# Altium PCB Tree.pcbdoc
Units mil, origin at the board's own origin, x right, y up, seen from the top; angles counter-clockwise.
Board outline 645 x 1245 mil, 4 copper layers (Top Layer, Mid-Layer 1, Mid-Layer 2, Bottom Layer); 3 components, 51 nets, 301 pads, 176 vias.
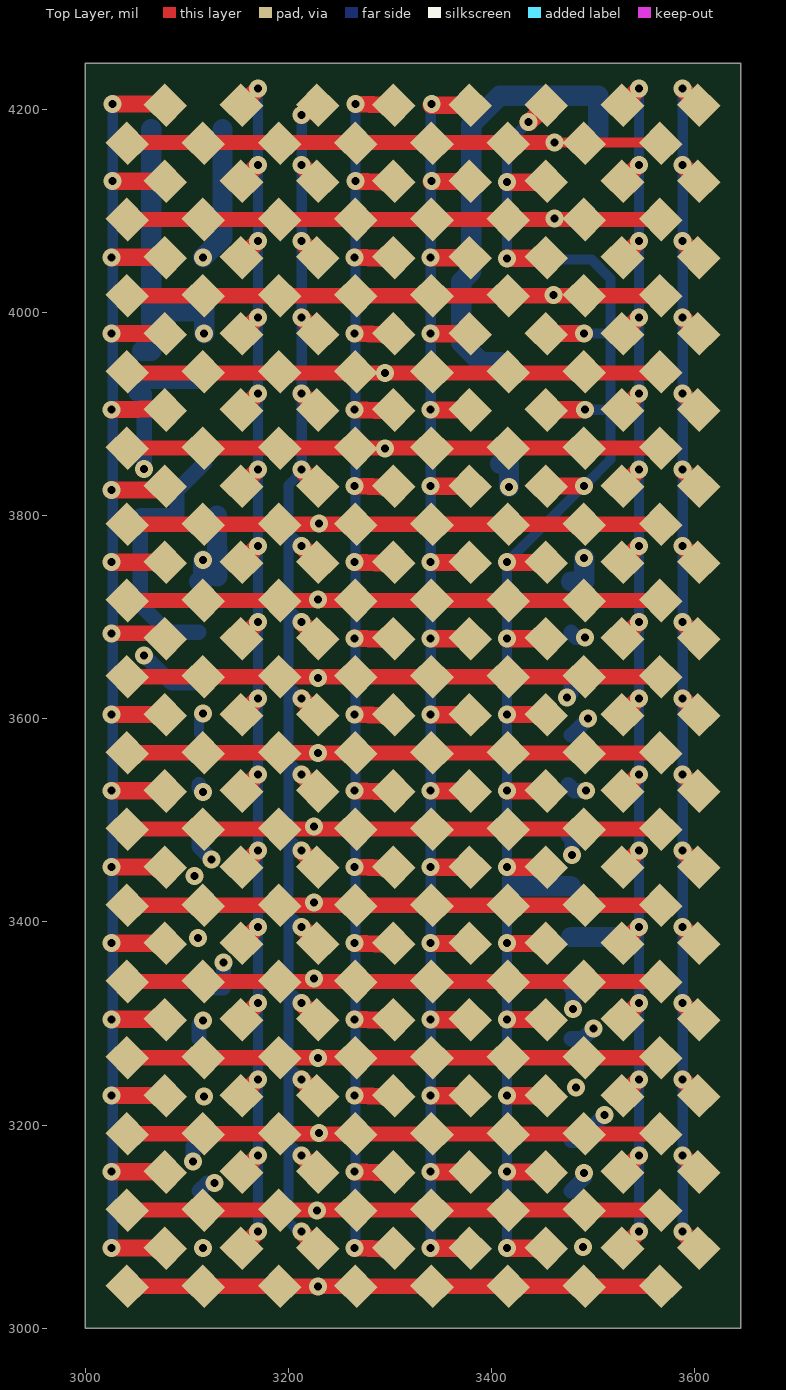
[diagram p0: Top Layer view]
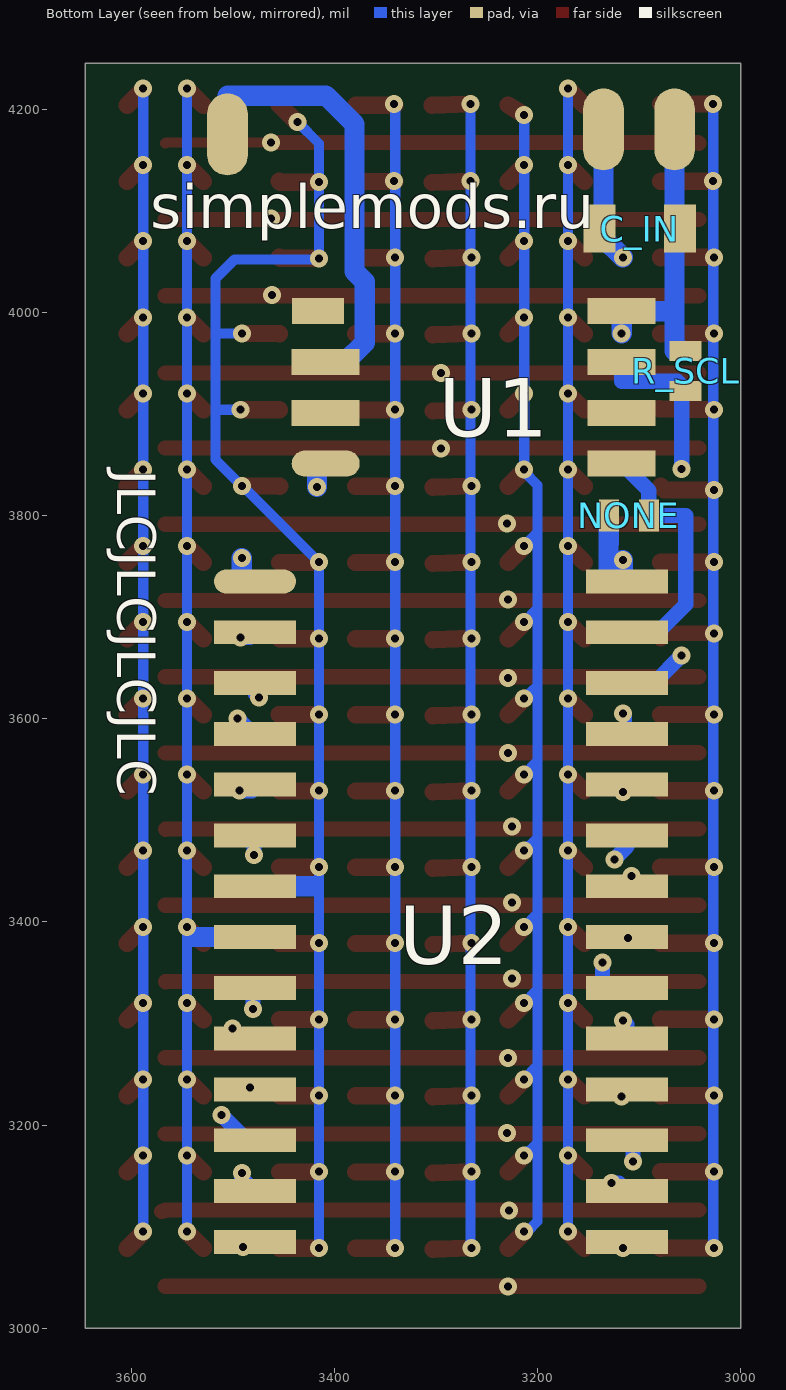
[diagram p1: Bottom Layer view, seen from below]
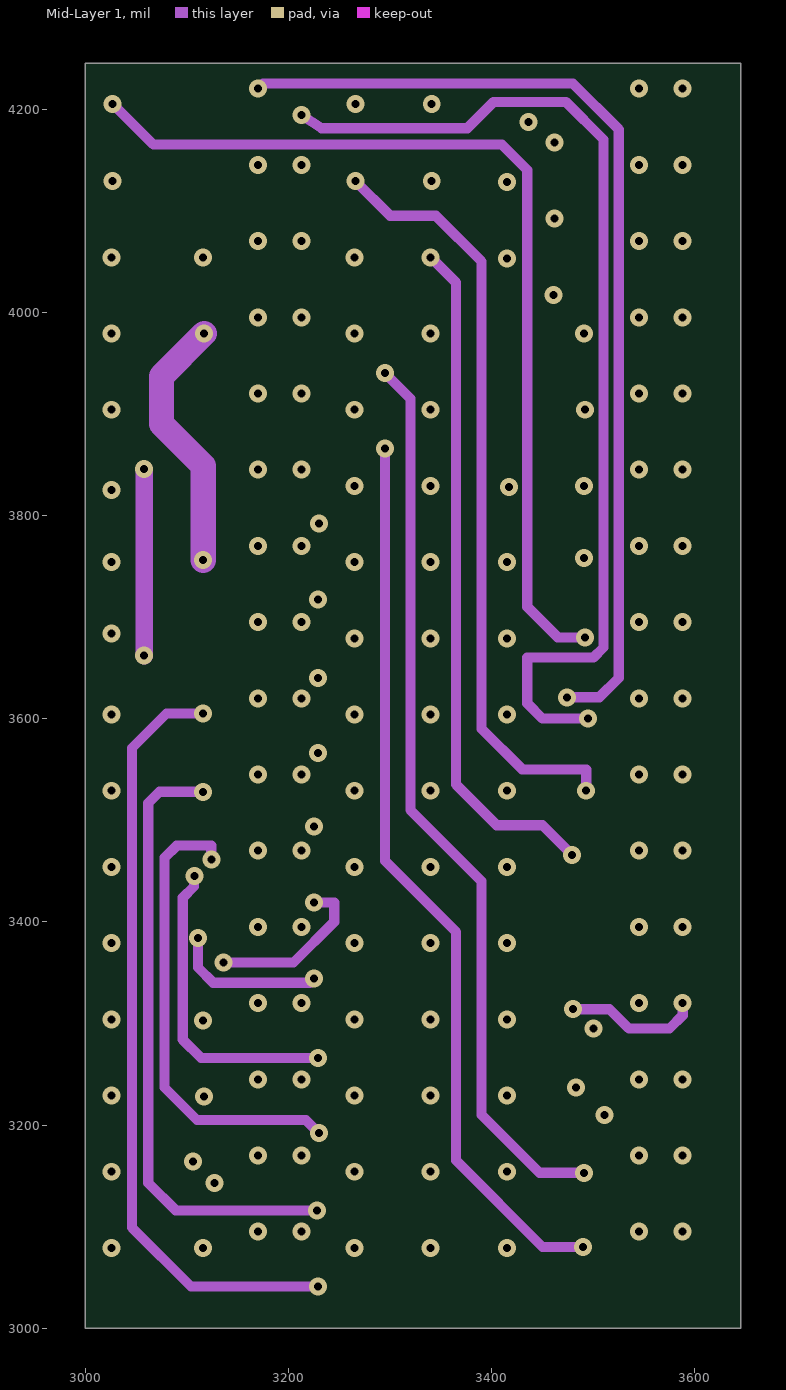
[diagram p2: Mid-Layer 1]
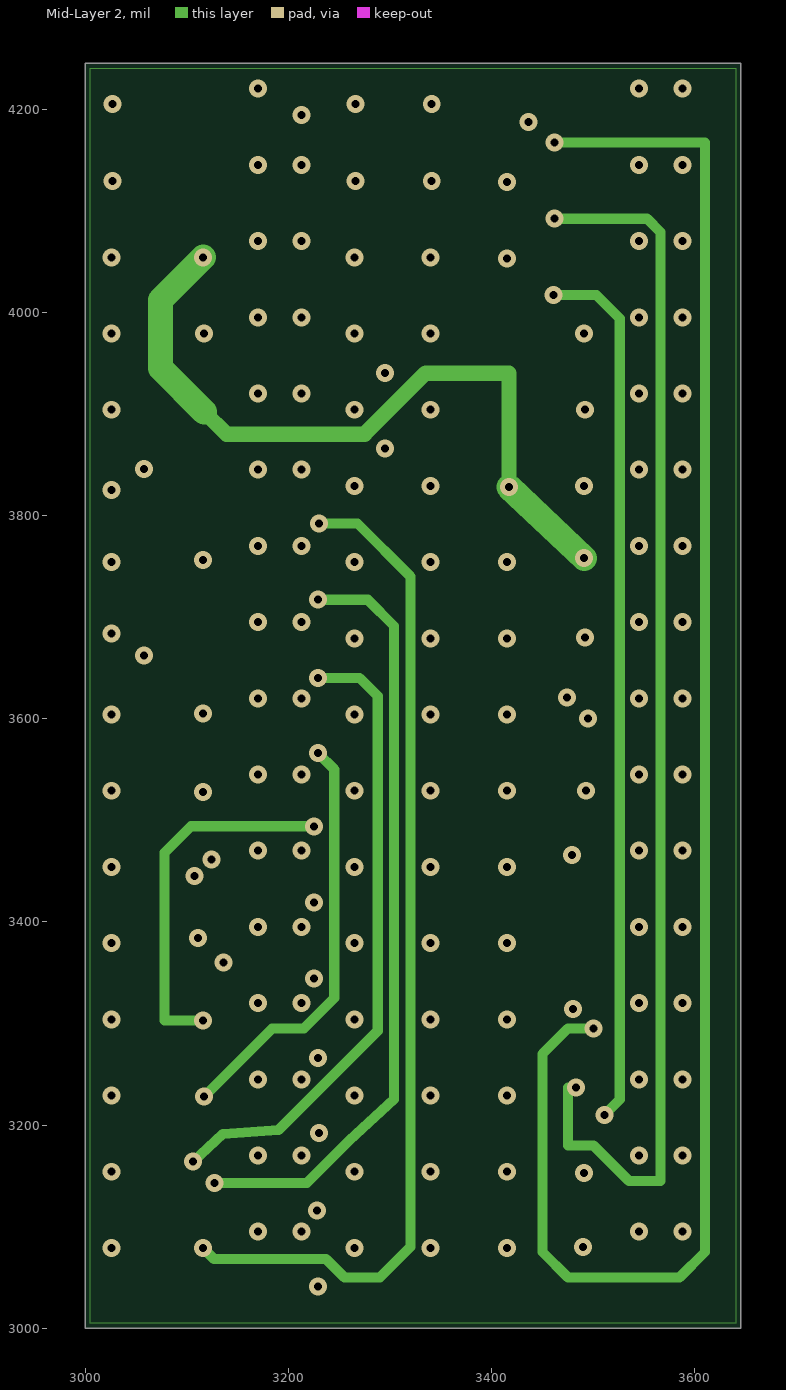
[diagram p3: Mid-Layer 2]

## Layer stack, top to bottom
Top Solder: solder mask 0.4, Solder Resist, Dk 3.5
Top Layer: signal copper 1.4
Dielectric 1: dielectric 12.6, FR-4, Dk 4.8
Mid-Layer 1: signal copper 1.4
Dielectric3: dielectric 12.6, FR-4, Dk 4.8
Mid-Layer 2: signal copper 1.4
Dielectric2: dielectric 12.6, FR-4, Dk 4.8
Bottom Layer: signal copper 1.4
Bottom Solder: solder mask 0.4, Solder Resist, Dk 3.5

## Board outline
3000,4245 3645,4245 3645,3000 3000,3000

## Design rules (kind name [scope] priority, off if disabled: settings)
AssemblyTestPointUsage [All] p0: scope1count=1 scope1_0_kind=Board scope1_0_value=Board scope2count=1 scope2_0_kind=Board scope2_0_value=Board commentlength=0
AssemblyTestpoint [All] p0: scope1count=1 scope1_0_kind=Board scope1_0_value=Board scope2count=1 scope2_0_kind=Board scope2_0_value=Board commentlength=0
Clearance [All] p0: scope1count=1 scope1_0_kind=Board scope1_0_value=Board scope2count=1 scope2_0_kind=Board scope2_0_value=Board commentlength=0 gap=10
Clearance [All] p1: gap=10 ignorepadtopadclearanceinfootprint=FALSE except(0: Arc-Hole Track-Hole SMDPad-Hole THPad-Hole Via-Hole Fill-Hole Poly-Hole Region-Hole Text-Hole)
ComponentClearance [All] p0: scope1count=1 scope1_0_kind=Board scope1_0_value=Board scope2count=1 scope2_0_kind=Board scope2_0_value=Board commentlength=0 gap=10 collisioncheckmode=3
DiffPairsRouting [All] p0: scope1count=1 scope1_0_kind=Board scope1_0_value=Board scope2count=1 scope2_0_kind=Board scope2_0_value=Board commentlength=0
FabricationTestPointUsage [All] p0: scope1count=1 scope1_0_kind=Board scope1_0_value=Board scope2count=1 scope2_0_kind=Board scope2_0_value=Board commentlength=0 valid=0 allowmultiple=FALSE
FabricationTestpoint [All] p0: scope1count=1 scope1_0_kind=Board scope1_0_value=Board scope2count=1 scope2_0_kind=Board scope2_0_value=Board commentlength=0 side=3 testpointundercomponent=TRUE minsize=40 maxsize=100 preferedsize=60 minholesize=0 maxholesize=40 preferedholesize=32 testpointgrid=1
FanoutControl Fanout_BGA [All] p0 off: scope1count=1 scope1_0_kind=Board scope1_0_value=Board scope2count=1 scope2_0_kind=Board scope2_0_value=Board commentlength=69 // Protel DXP Scope 1 Expression Was: IsBGA   Fanout_BGA (Default Rule)
FanoutControl Fanout_LCC [All] p0 off: scope1count=1 scope1_0_kind=Board scope1_0_value=Board scope2count=1 scope2_0_kind=Board scope2_0_value=Board commentlength=69 // Protel DXP Scope 1 Expression Was: IsLCC   Fanout_LCC (Default Rule)
FanoutControl Fanout_SOIC [All] p0 off: scope1count=1 scope1_0_kind=Board scope1_0_value=Board scope2count=1 scope2_0_kind=Board scope2_0_value=Board commentlength=71 // Protel DXP Scope 1 Expression Was: IsSOIC   Fanout_SOIC (Default Rule)
FanoutControl Fanout_Small [All] p0 off: scope1count=1 scope1_0_kind=Board scope1_0_value=Board scope2count=1 scope2_0_kind=Board scope2_0_value=Board commentlength=84 // Protel DXP Scope 1 Expression Was: (CompPinCount < 5)   Fanout_Small (Default Rule)
FanoutControl Fanout_Default [All] p0: scope1count=1 scope1_0_kind=Board scope1_0_value=Board scope2count=1 scope2_0_kind=Board scope2_0_value=Board commentlength=30 // Fanout_Default (Default Rule)
Height [All] p0: scope1count=1 scope1_0_kind=Board scope1_0_value=Board scope2count=1 scope2_0_kind=Board scope2_0_value=Board commentlength=0
HoleSize [All] p0: scope1count=1 scope1_0_kind=Board scope1_0_value=Board scope2count=1 scope2_0_kind=Board scope2_0_value=Board commentlength=0 absolutevalues=TRUE maxlimit=100 minlimit=1 maxpercent=80.000 minpercent=20.000
HoleToHoleClearance [All] p0: scope1count=1 scope1_0_kind=Board scope1_0_value=Board scope2count=1 scope2_0_kind=Board scope2_0_value=Board commentlength=0
LayerPairs [All] p0: scope1count=1 scope1_0_kind=Board scope1_0_value=Board scope2count=1 scope2_0_kind=Board scope2_0_value=Board commentlength=0 enforce=TRUE
MinimumSolderMaskSliver [All] p0: scope1count=1 scope1_0_kind=Board scope1_0_value=Board scope2count=1 scope2_0_kind=Board scope2_0_value=Board commentlength=0
NetAntennae [All] p0: scope1count=1 scope1_0_kind=Board scope1_0_value=Board scope2count=1 scope2_0_kind=Board scope2_0_value=Board commentlength=0
PasteMaskExpansion [All] p0: scope1count=1 scope1_0_kind=Board scope1_0_value=Board scope2count=1 scope2_0_kind=Board scope2_0_value=Board commentlength=0 expansion=0
PlaneClearance [All] p0: scope1count=1 scope1_0_kind=Board scope1_0_value=Board scope2count=1 scope2_0_kind=Board scope2_0_value=Board commentlength=0 clearance=20
PlaneConnect [All] p0: scope1count=1 scope1_0_kind=Board scope1_0_value=Board scope2count=1 scope2_0_kind=Board scope2_0_value=Board commentlength=0 planeconnectstyle=Relief reliefexpansion=20 reliefentries=4 reliefconductorwidth=10 reliefairgap=10
PolygonConnect [All] p0: scope1count=1 scope1_0_kind=Board scope1_0_value=Board scope2count=1 scope2_0_kind=Board scope2_0_value=Board commentlength=0 connectstyle=Relief reliefconductorwidth=10 reliefentries=4 polygonreliefangle="90 Angle"
PolygonConnect [All] p1: connectstyle=Relief reliefconductorwidth=10 reliefentries=4 polygonreliefangle="90 Angle" airgapwidth=10
RoutingCorners [All] p0: scope1count=1 scope1_0_kind=Board scope1_0_value=Board scope2count=1 scope2_0_kind=Board scope2_0_value=Board commentlength=0 cornerstyle=45-Degree minsetback=100 maxsetback=100
RoutingLayers [All] p0: scope1count=1 scope1_0_kind=Board scope1_0_value=Board scope2count=1 scope2_0_kind=Board scope2_0_value=Board commentlength=0 top layer=Automatic mid layer 1=Automatic mid layer 2=Automatic bottom layer=Automatic
RoutingPriority [All] p0: scope1count=1 scope1_0_kind=Board scope1_0_value=Board scope2count=1 scope2_0_kind=Board scope2_0_value=Board commentlength=0
RoutingTopology [All] p0: scope1count=1 scope1_0_kind=Board scope1_0_value=Board scope2count=1 scope2_0_kind=Board scope2_0_value=Board commentlength=0 topology=Shortest
RoutingVias [All] p0: scope1count=1 scope1_0_kind=Board scope1_0_value=Board scope2count=1 scope2_0_kind=Board scope2_0_value=Board commentlength=0 holewidth=28 width=50 viastyle="Through Hole" minholewidth=28 minwidth=50 maxholewidth=28 maxwidth=50
RoutingVias [All] p1: holewidth=28 width=50 viastyle="Through Hole" minholewidth=28 minwidth=50 maxholewidth=28 maxwidth=50
ShortCircuit [All] p0: scope1count=1 scope1_0_kind=Board scope1_0_value=Board scope2count=1 scope2_0_kind=Board scope2_0_value=Board commentlength=0 allowed=FALSE
SilkToBoardRegionClearance [All] p0: scope1count=1 scope1_0_kind=Board scope1_0_value=Board scope2count=1 scope2_0_kind=Board scope2_0_value=Board commentlength=0
SilkToSilkClearance [All] p0: scope1count=1 scope1_0_kind=Board scope1_0_value=Board scope2count=1 scope2_0_kind=Board scope2_0_value=Board commentlength=0
SilkToSolderMaskClearance [All] p0 off: scope1count=1 scope1_0_kind=Board scope1_0_value=Board scope2count=1 scope2_0_kind=Board scope2_0_value=Board commentlength=44 // Protel DXP Scope 1 Expression Was: IsPad
SolderMaskExpansion [All] p0: scope1count=1 scope1_0_kind=Board scope1_0_value=Board scope2count=1 scope2_0_kind=Board scope2_0_value=Board commentlength=0 expansion=4
SolderMaskExpansion [All] p1: expansion=4 istentingtop=FALSE
UnRoutedNet [All] p0: scope1count=1 scope1_0_kind=Board scope1_0_value=Board scope2count=1 scope2_0_kind=Board scope2_0_value=Board commentlength=0
UnpouredPolygon [All] p0: scope1count=1 scope1_0_kind=Board scope1_0_value=Board scope2count=1 scope2_0_kind=Board scope2_0_value=Board commentlength=0
Width [All] p0: scope1count=1 scope1_0_kind=Board scope1_0_value=Board scope2count=1 scope2_0_kind=Board scope2_0_value=Board commentlength=0 maxlimit=10 minlimit=10 preferedwidth=10
Width [All] p1: maxlimit=10 minlimit=10 preferedwidth=10
30 further rules are at their usual default settings.

## Components (designator, comment, footprint, x,y, rotation, side; value= is the part's Value field where it differs from the comment)
C_IN "" --#1 3140,4130 r0 bottom
NONE "R_SDA" --#2 3173.78,3847.73 r0 bottom
R_SCL "R_SCL" --#3 3147.78,3990 r0 bottom

## Footprints (in the part's own frame and the unit in brackets; to place one, negate y for a bottom-side part, rotate by r counter-clockwise, add the part's x,y. Pads: shape width x height; smd on the part's side, far side on the other; paste and mask are expansions set on the pad)
--#1 [mil]
  rect 31.5x47.2 smd mask+0: 1(-80.12,47.7) 2(-1.32,47.7)
--#2 [mil]
  rect 19.68x31.5 smd mask+0: 1(-44.11,47.73) 2(-83.47,47.73)
--#3 [mil]
  rect 31.5x19.68 smd mask+0: 1(-93.78,28) 2(-93.78,67.37)

## Free pads (board coordinates)
  rect 29.53x31.5 smd rot 45 mask+0: 1(3041.26,3041.26) 1(3041.26,3116.26) 1(3041.26,3191.26) 1(3041.26,3266.26) 1(3041.26,3341.26) 1(3041.26,3416.26) 1(3041.26,3491.26) 1(3041.26,3566.26) 1(3041.26,3641.26) 1(3041.26,3716.26) 1(3041.26,3791.26) 1(3041.26,3866.26) 1(3041.26,3941.26) 1(3041.26,4016.26) 1(3041.26,4091.26) 1(3041.26,4166.26) 1(3116.26,3041.26) 1(3116.26,3116.26) 1(3116.26,3191.26) 1(3116.26,3266.26) 1(3116.26,3341.26) 1(3116.26,3416.26) 1(3116.26,3491.26) 1(3116.26,3566.26) 1(3116.26,3641.26) 1(3116.26,3716.26) 1(3116.26,3791.26) 1(3116.26,3866.26) 1(3116.26,3941.26) 1(3116.26,4016.26) 1(3116.26,4091.26) 1(3116.26,4166.26) 1(3191.26,3041.26) 1(3191.26,3116.26) 1(3191.26,3191.26) 1(3191.26,3266.26) 1(3191.26,3341.26) 1(3191.26,3416.26) 1(3191.26,3491.26) 1(3191.26,3566.26) 1(3191.26,3641.26) 1(3191.26,3716.26) 1(3191.26,3791.26) 1(3191.26,3866.26) 1(3191.26,3941.26) 1(3191.26,4016.26) 1(3191.26,4091.26) 1(3191.26,4166.26) 1(3266.26,3041.26) 1(3266.26,3116.26) 1(3266.26,3191.26) 1(3266.26,3266.26) 1(3266.26,3341.26) 1(3266.26,3416.26) 1(3266.26,3491.26) 1(3266.26,3566.26) 1(3266.26,3641.26) 1(3266.26,3716.26) 1(3266.26,3791.26) 1(3266.26,3866.26) 1(3266.26,3941.26) 1(3266.26,4016.26) 1(3266.26,4091.26) 1(3266.26,4166.26) 1(3341.26,3041.26) 1(3341.26,3116.26) 1(3341.26,3191.26) 1(3341.26,3266.26) 1(3341.26,3341.26) 1(3341.26,3416.26) 1(3341.26,3491.26) 1(3341.26,3566.26) 1(3341.26,3641.26) 1(3341.26,3716.26) 1(3341.26,3791.26) 1(3341.26,3866.26) 1(3341.26,3941.26) 1(3341.26,4016.26) 1(3341.26,4091.26) 1(3341.26,4166.26) 1(3416.26,3041.26) 1(3416.26,3116.26) 1(3416.26,3191.26) 1(3416.26,3266.26) 1(3416.26,3341.26) 1(3416.26,3416.26) 1(3416.26,3491.26) 1(3416.26,3566.26) 1(3416.26,3641.26) 1(3416.26,3716.26) 1(3416.26,3791.26) 1(3416.26,3866.26) 1(3416.26,3941.26) 1(3416.26,4016.26) 1(3416.26,4091.26) 1(3416.26,4166.26) 1(3491.26,3041.26) 1(3491.26,3116.26) 1(3491.26,3191.26) 1(3491.26,3266.26) 1(3491.26,3341.26) 1(3491.26,3416.26) 1(3491.26,3491.26) 1(3491.26,3566.26) 1(3491.26,3641.26) 1(3491.26,3716.26) 1(3491.26,3791.26) 1(3491.26,3866.26) 1(3491.26,3941.26) 1(3491.26,4016.26) 1(3491.26,4091.26) 1(3491.26,4166.26) 1(3566.26,3041.26) 1(3566.26,3116.26) 1(3566.26,3191.26) 1(3566.26,3266.26) 1(3566.26,3341.26) 1(3566.26,3416.26) 1(3566.26,3491.26) 1(3566.26,3566.26) 1(3566.26,3641.26) 1(3566.26,3716.26) 1(3566.26,3791.26) 1(3566.26,3866.26) 1(3566.26,3941.26) 1(3566.26,4016.26) 1(3566.26,4091.26) 1(3566.26,4166.26) 2(3078.74,3078.74) 2(3078.74,3153.74) 2(3078.74,3228.74) 2(3078.74,3303.74) 2(3078.74,3378.74) 2(3078.74,3453.74) 2(3078.74,3528.74) 2(3078.74,3603.74) 2(3078.74,3678.74) 2(3078.74,3753.74) 2(3078.74,3828.74) 2(3078.74,3903.74) 2(3078.74,3978.74) 2(3078.74,4053.74) 2(3078.74,4128.74) 2(3078.74,4203.74) 2(3153.74,3078.74) 2(3153.74,3153.74) 2(3153.74,3228.74) 2(3153.74,3303.74) 2(3153.74,3378.74) 2(3153.74,3453.74) 2(3153.74,3528.74) 2(3153.74,3603.74) 2(3153.74,3678.74) 2(3153.74,3753.74) 2(3153.74,3828.74) 2(3153.74,3903.74) 2(3153.74,3978.74) 2(3153.74,4053.74) 2(3153.74,4128.74) 2(3153.74,4203.74) 2(3228.74,3078.74) 2(3228.74,3153.74) 2(3228.74,3228.74) 2(3228.74,3303.74) 2(3228.74,3378.74) 2(3228.74,3453.74) 2(3228.74,3528.74) 2(3228.74,3603.74) 2(3228.74,3678.74) 2(3228.74,3753.74) 2(3228.74,3828.74) 2(3228.74,3903.74) 2(3228.74,3978.74) 2(3228.74,4053.74) 2(3228.74,4128.74) 2(3228.74,4203.74) 2(3303.74,3078.74) 2(3303.74,3153.74) 2(3303.74,3228.74) 2(3303.74,3303.74) 2(3303.74,3378.74) 2(3303.74,3453.74) 2(3303.74,3528.74) 2(3303.74,3603.74) 2(3303.74,3678.74) 2(3303.74,3753.74) 2(3303.74,3828.74) 2(3303.74,3903.74) 2(3303.74,3978.74) 2(3303.74,4053.74) 2(3303.74,4128.74) 2(3303.74,4203.74) 2(3378.74,3078.74) 2(3378.74,3153.74) 2(3378.74,3228.74) 2(3378.74,3303.74) 2(3378.74,3378.74) 2(3378.74,3453.74) 2(3378.74,3528.74) 2(3378.74,3603.74) 2(3378.74,3678.74) 2(3378.74,3753.74) 2(3378.74,3828.74) 2(3378.74,3903.74) 2(3378.74,3978.74) 2(3378.74,4053.74) 2(3378.74,4128.74) 2(3378.74,4203.74) 2(3453.74,3078.74) 2(3453.74,3153.74) 2(3453.74,3228.74) 2(3453.74,3303.74) 2(3453.74,3378.74) 2(3453.74,3453.74) 2(3453.74,3528.74) 2(3453.74,3603.74) 2(3453.74,3678.74) 2(3453.74,3753.74) 2(3453.74,3828.74) 2(3453.74,3903.74) 2(3453.74,3978.74) 2(3453.74,4053.74) 2(3453.74,4128.74) 2(3453.74,4203.74) 2(3528.74,3078.74) 2(3528.74,3153.74) 2(3528.74,3228.74) 2(3528.74,3303.74) 2(3528.74,3378.74) 2(3528.74,3453.74) 2(3528.74,3528.74) 2(3528.74,3603.74) 2(3528.74,3678.74) 2(3528.74,3753.74) 2(3528.74,3828.74) 2(3528.74,3903.74) 2(3528.74,3978.74) 2(3528.74,4053.74) 2(3528.74,4128.74) 2(3528.74,4203.74) 2(3603.74,3078.74) 2(3603.74,3153.74) 2(3603.74,3228.74) 2(3603.74,3303.74) 2(3603.74,3378.74) 2(3603.74,3453.74) 2(3603.74,3528.74) 2(3603.74,3603.74) 2(3603.74,3678.74) 2(3603.74,3753.74) 2(3603.74,3828.74) 2(3603.74,3903.74) 2(3603.74,3978.74) 2(3603.74,4053.74) 2(3603.74,4128.74) 2(3603.74,4203.74)
  oval 40x80.7 smd far side mask+0: 1(3065,4180) 1(3135,4180) 1(3505,4175)
  rect 50.93x25.59 smd far side mask+0: 1(3416,4001)
  oval 80.7x23.6 smd far side mask+0: 1(3478,3735)
  rect 66.93x25.59 smd far side mask+0: 2(3408.34,3951) 3(3408.34,3901) 5(3117,3851) 6(3117,3901) 7(3117,3951) 8(3117,4001)
  rect 80.7x23.6 smd far side mask+0: 2(3478,3685) 3(3478,3635) 4(3478,3585) 5(3478,3535) 6(3478,3485) 7(3478,3435) 8(3478,3385) 9(3478,3335) 10(3478,3285) 11(3478,3235) 12(3478,3185) 13(3478,3135) 14(3478,3085) 15(3112,3085) 16(3112,3135) 17(3112,3185) 18(3112,3235) 19(3112,3285) 20(3112,3335) 21(3112,3385) 22(3112,3435) 23(3112,3485) 24(3112,3535) 25(3112,3585) 26(3112,3635) 27(3112,3685) 28(3112,3735)
  oval 66.93x25.59 smd far side mask+0: 4(3408.34,3851)

## Via types
v1: diameter 17.72, hole 7.87, Top Layer to Bottom Layer, 176 vias

## Nets (pads, with @x,y where several pads share a name; then routed paths per layer and width w, separated by ;. In a path a pad name is that pad's centre, name@x,y a point inside that pad or via, vN(x,y) a via of type N, cw(c..) or ccw(c..) an arc to the next point about the centre after c; other vN are vias at no path point)
COL_1: pad.2@3078.74,3078.74 pad.2@3078.74,3153.74 pad.2@3078.74,3228.74 pad.2@3078.74,3303.74 pad.2@3078.74,3378.74 pad.2@3078.74,3453.74 pad.2@3078.74,3528.74 pad.2@3078.74,3603.74 pad.2@3078.74,3678.74 pad.2@3078.74,3753.74 pad.2@3078.74,3828.74 pad.2@3078.74,3903.74 pad.2@3078.74,3978.74 pad.2@3078.74,4053.74 pad.2@3078.74,4128.74 pad.2@3078.74,4203.74 pad.2@3478,3685 | length 2927.5
  Top Layer w15: v1(3026,3684) 3078.7,3684 pad.2@3078.7,3678.7
  Top Layer w17: v1(3026,3079) 3078.48,3079 pad.2@3078.74,3078.74 ; v1(3026,3154) 3078.48,3154 pad.2@3078.74,3153.74 ; v1(3026,3229) 3078.48,3229 pad.2@3078.74,3228.74 ; v1(3026,3304) 3078.48,3304 pad.2@3078.74,3303.74 ; v1(3026,3379) 3078.48,3379 pad.2@3078.74,3378.74 ; v1(3026,3454) 3078.48,3454 pad.2@3078.74,3453.74 ; v1(3026,3529) 3078.48,3529 pad.2@3078.74,3528.74 ; v1(3026,3604) 3078.48,3604 pad.2@3078.74,3603.74 ; v1(3026,3754) 3078.48,3754 pad.2@3078.74,3753.74 ; v1(3026,3825) 3075,3825 pad.2@3078.7,3828.7 ; v1(3026,3904) pad.2@3080,3905 ; v1(3026,3979) 3078.48,3979 pad.2@3078.74,3978.74 ; v1(3026,4054) 3078.48,4054 pad.2@3078.74,4053.74 ; v1(3027,4129) 3078.48,4129 pad.2@3078.74,4128.74 ; v1(3027,4205) pad.2@3078.7,4205
  Mid-Layer 1 w10: v1(3027,4205) 3067,4165 3410,4165 3435,4140 3435,3710 3465,3680 v1(3492,3680)
  Bottom Layer w10: v1@3027,3081 v1@3027,4207
  Bottom Layer w15: pad.2@3478,3685 3483,3680 v1(3492,3680)
COL_2: pad.2@3153.74,3078.74 pad.2@3153.74,3153.74 pad.2@3153.74,3228.74 pad.2@3153.74,3303.74 pad.2@3153.74,3378.74 pad.2@3153.74,3453.74 pad.2@3153.74,3528.74 pad.2@3153.74,3603.74 pad.2@3153.74,3678.74 pad.2@3153.74,3753.74 pad.2@3153.74,3828.74 pad.2@3153.74,3903.74 pad.2@3153.74,3978.74 pad.2@3153.74,4053.74 pad.2@3153.74,4128.74 pad.2@3153.74,4203.74 pad.3@3478,3635 | length 2483.2
  Top Layer w17: pad.2@3153.74,3078.74 v1(3170,3095) ; pad.2@3153.74,3153.74 v1(3170,3170) ; pad.2@3153.74,3228.74 v1(3170,3245) ; pad.2@3153.74,3303.74 v1(3170,3320) ; pad.2@3153.74,3378.74 v1(3170,3395) ; pad.2@3153.74,3453.74 v1(3170,3470) ; pad.2@3153.74,3528.74 v1(3170,3545) ; pad.2@3153.74,3603.74 v1(3170,3620) ; pad.2@3153.74,3678.74 v1(3170,3695) ; pad.2@3153.74,3753.74 v1(3170,3770) ; pad.2@3153.74,3828.74 v1(3170,3845) ; pad.2@3153.74,3903.74 v1(3170,3920) ; pad.2@3153.74,3978.74 v1(3170,3995) ; pad.2@3153.74,4053.74 v1(3170,4070) ; pad.2@3153.74,4128.74 v1(3170,4145) ; pad.2@3153.74,4203.74 v1(3170,4220)
  Mid-Layer 1 w10: v1(3170,4220) 3175.1,4225 3480,4225 3525,4180 3525,3640 3506,3621 v1(3474,3621)
  Bottom Layer w10: v1(3170,3095) v1(3170,3245) v1(3170,4220)
  Bottom Layer w15: v1(3474,3621) 3478,3625 pad.3@3478,3635
COL_3: pad.2@3228.74,3078.74 pad.2@3228.74,3153.74 pad.2@3228.74,3228.74 pad.2@3228.74,3303.74 pad.2@3228.74,3378.74 pad.2@3228.74,3453.74 pad.2@3228.74,3528.74 pad.2@3228.74,3603.74 pad.2@3228.74,3678.74 pad.2@3228.74,3753.74 pad.2@3228.74,3828.74 pad.2@3228.74,3903.74 pad.2@3228.74,3978.74 pad.2@3228.74,4053.74 pad.2@3228.74,4128.74 pad.2@3228.74,4203.74 pad.4@3478,3585 | length 2678.8
  Top Layer w17: v1(3213,3095) 3213,3094.48 pad.2@3228.74,3078.74 ; v1(3213,3170) 3213,3169.48 pad.2@3228.74,3153.74 ; v1(3213,3245) 3213,3244.48 pad.2@3228.74,3228.74 ; v1(3213,3320) 3213,3319.48 pad.2@3228.74,3303.74 ; v1(3213,3395) 3213,3394.48 pad.2@3228.74,3378.74 ; v1(3213,3470) 3213,3469.48 pad.2@3228.74,3453.74 ; v1(3213,3545) 3213,3544.48 pad.2@3228.74,3528.74 ; v1(3213,3620) 3213,3619.48 pad.2@3228.74,3603.74 ; v1(3213,3695) 3213,3694.48 pad.2@3228.74,3678.74 ; v1(3213,3770) 3213,3769.48 pad.2@3228.74,3753.74 ; v1(3213,3845) 3213,3844.48 pad.2@3228.74,3828.74 ; v1(3213,3920) 3213,3919.48 pad.2@3228.74,3903.74 ; v1(3213,3995) 3213,3994.48 pad.2@3228.74,3978.74 ; v1(3213,4070) 3213,4069.48 pad.2@3228.74,4053.74 ; v1(3213,4145) 3213,4144.48 pad.2@3228.74,4128.74 ; v1(3213,4194) pad.2@3229,4204
  Mid-Layer 1 w10: v1(3213,4194) 3232.7,4181 3376,4181 3402,4207 3473,4207 3510,4170 3510,3670 3500,3660 3435,3660 3435,3615 3450,3600 v1(3495,3600)
  Bottom Layer w10: 3200,3182.8 v1(3213,3170) ; 3200,3258.5 v1(3213,3245) ; 3200,3333.2 v1(3213,3320) ; 3200,3408.3 v1(3213,3395) ; 3200,3482.8 v1(3213,3470) ; 3200,3558.3 v1(3213,3545) ; 3200,3632.4 v1(3213,3620) ; 3200,3708 v1(3213,3695) ; v1(3213,3095) 3210,3095 3200,3105 3200,3783 ; v1(3213,3770) 3200,3783 ; v1(3213,4194) v1(3213,4145) v1(3213,3845) 3213,3843 3200,3830 3200,3783
  Bottom Layer w15: pad.4@3478,3584 3479,3584 v1(3495,3600)
COL_4: pad.2@3303.74,3078.74 pad.2@3303.74,3153.74 pad.2@3303.74,3228.74 pad.2@3303.74,3303.74 pad.2@3303.74,3378.74 pad.2@3303.74,3453.74 pad.2@3303.74,3528.74 pad.2@3303.74,3603.74 pad.2@3303.74,3678.74 pad.2@3303.74,3753.74 pad.2@3303.74,3828.74 pad.2@3303.74,3903.74 pad.2@3303.74,3978.74 pad.2@3303.74,4053.74 pad.2@3303.74,4128.74 pad.2@3303.74,4203.74 pad.5@3478,3535 | length 2508.3
  Top Layer w17: v1(3265,3079) pad.2@3302.74,3077.74 ; v1(3265,3154) pad.2@3302.74,3152.74 ; v1(3265,3229) pad.2@3302.74,3227.74 ; v1(3265,3304) pad.2@3302.74,3302.74 ; v1(3265,3379) pad.2@3302.74,3377.74 ; v1(3265,3454) pad.2@3302.74,3452.74 ; v1(3265,3529) pad.2@3302.74,3527.74 ; v1(3265,3604) pad.2@3302.74,3602.74 ; v1(3265,3679) pad.2@3302.74,3677.74 ; v1(3265,3754) pad.2@3302.74,3752.74 ; v1(3265,3829) pad.2@3302.74,3827.74 ; v1(3265,3904) pad.2@3302.74,3902.74 ; v1(3265,3979) pad.2@3302.74,3977.74 ; v1(3265,4054) pad.2@3302.74,4052.74 ; v1(3266,4129) pad.2@3303.74,4127.74 ; v1(3266,4205) pad.2@3303.74,4203.74
  Mid-Layer 1 w10: v1(3266,4129) 3300,4095 3345,4095 3390,4050 3390,3590 3430,3550 3493,3550 v1(3493,3529)
  Bottom Layer w10: v1(3265,3079) 3266,3080 v1(3266,4205)
  Bottom Layer w15: pad.5@3475,3535 3481,3529 v1(3493,3529)
  other v1: 3265,3079 3265,3154
COL_5: pad.2@3378.74,3078.74 pad.2@3378.74,3153.74 pad.2@3378.74,3228.74 pad.2@3378.74,3303.74 pad.2@3378.74,3378.74 pad.2@3378.74,3453.74 pad.2@3378.74,3528.74 pad.2@3378.74,3603.74 pad.2@3378.74,3678.74 pad.2@3378.74,3753.74 pad.2@3378.74,3828.74 pad.2@3378.74,3903.74 pad.2@3378.74,3978.74 pad.2@3378.74,4053.74 pad.2@3378.74,4128.74 pad.2@3378.74,4203.74 pad.6@3478,3485 | length 2432.1
  Top Layer w17: v1@3340.42,3078.74 pad.2@3378.74,3078.74 ; v1@3340.42,3153.74 pad.2@3378.74,3153.74 ; v1@3340.42,3228.74 pad.2@3378.74,3228.74 ; v1@3340.42,3303.74 pad.2@3378.74,3303.74 ; v1@3340.42,3378.74 pad.2@3378.74,3378.74 ; v1@3340.42,3453.74 pad.2@3378.74,3453.74 ; v1@3340.42,3528.74 pad.2@3378.74,3528.74 ; v1@3340.42,3603.74 pad.2@3378.74,3603.74 ; v1@3340.42,3678.74 pad.2@3378.74,3678.74 ; v1@3340.42,3753.74 pad.2@3378.74,3753.74 ; v1@3340.42,3828.74 pad.2@3378.74,3828.74 ; v1@3340.42,3903.74 pad.2@3378.74,3903.74 ; v1@3340.42,3978.74 pad.2@3378.74,3978.74 ; v1@3340.42,4053.74 pad.2@3378.74,4053.74 ; v1@3340.42,4128.74 pad.2@3378.74,4128.74 ; v1@3340.42,4203.74 pad.2@3378.74,4203.74
  Mid-Layer 1 w10: v1(3340,4054) 3365,4029 3365,3535 3405,3495 3450,3495 v1(3479,3466)
  Bottom Layer w10: v1(3340,3079) 3340,4204 v1(3341,4205)
  Bottom Layer w15: pad.6@3475,3485 3479,3481 v1(3479,3466)
  other v1: 3340,3154 3340,3229 3340,3304 3340,3379 3340,3454 3340,3529 3340,3604 3340,3679 3340,3754 3340,3829 3340,3904 3340,3979 3341,4129 3341,4205
COL_6: pad.2@3453.74,3078.74 pad.2@3453.74,3153.74 pad.2@3453.74,3228.74 pad.2@3453.74,3303.74 pad.2@3453.74,3378.74 pad.2@3453.74,3453.74 pad.2@3453.74,3528.74 pad.2@3453.74,3603.74 pad.2@3453.74,3678.74 pad.2@3453.74,3753.74 pad.2@3453.74,3828.74 pad.2@3453.74,3903.74 pad.2@3453.74,3978.74 pad.2@3453.74,4053.74 pad.2@3453.74,4128.74 pad.2@3453.74,4203.74 pad.7@3478,3435 | length 1960.5
  Top Layer w17: v1(3415,3154) pad.2@3453.7,3153.7 ; v1(3415,3304) pad.2@3453.74,3303.74 ; v1(3415,3604) 3453.74,3603.74 pad.2@3454,3604 ; v1(3415,4053) 3453,4053 pad.2@3454,4054 ; v1(3415,4128) 3453,4128 pad.2@3454,4129 ; v1@3415.42,3078.74 pad.2@3453.74,3078.74 ; v1@3415.42,3228.74 pad.2@3453.74,3228.74 ; v1@3415.42,3378.74 pad.2@3453.74,3378.74 ; v1@3415.42,3453.74 pad.2@3453.74,3453.74 ; v1@3415.42,3528.74 pad.2@3453.74,3528.74 ; v1@3415.42,3678.74 pad.2@3453.74,3678.74 ; v1@3415.42,3753.74 pad.2@3453.74,3753.74 ; v1(3436,4187) 3437,4187 pad.2@3454,4204 ; pad.2@3453.7,3828.7 v1(3491,3829) ; pad.2@3453.74,3903.74 3454,3904 v1(3492,3904) ; pad.2@3453.74,3978.74 3454,3979 v1(3491,3979)
  Bottom Layer w10: v1(3415,3079) v1(3415,3754) 3490,3829 v1(3491,3829) 3517,3855 3517,4033 3498,4052 3416,4052 v1(3415,4053) v1(3415,4128) 3415,4166 v1(3436,4187) ; v1(3491,3979) 3517,3979 ; v1(3492,3904) 3517,3904
  Bottom Layer w20: 3420,3435 pad.7@3478,3435
  other v1: 3415,3229 3415,3379 3415,3454 3415,3529 3415,3679
COL_7: pad.2@3528.74,3078.74 pad.2@3528.74,3153.74 pad.2@3528.74,3228.74 pad.2@3528.74,3303.74 pad.2@3528.74,3378.74 pad.2@3528.74,3453.74 pad.2@3528.74,3528.74 pad.2@3528.74,3603.74 pad.2@3528.74,3678.74 pad.2@3528.74,3753.74 pad.2@3528.74,3828.74 pad.2@3528.74,3903.74 pad.2@3528.74,3978.74 pad.2@3528.74,4053.74 pad.2@3528.74,4128.74 pad.2@3528.74,4203.74 pad.8@3478,3385 | length 1555
  Top Layer w17: pad.2@3528.74,3078.74 v1(3545,3095) ; pad.2@3528.74,3153.74 v1(3545,3170) ; pad.2@3528.74,3228.74 v1(3545,3245) ; pad.2@3528.74,3303.74 v1(3545,3320) ; pad.2@3528.74,3378.74 v1(3545,3395) ; pad.2@3528.74,3453.74 v1(3545,3470) ; pad.2@3528.74,3528.74 v1(3545,3545) ; pad.2@3528.74,3603.74 v1(3545,3620) ; pad.2@3528.74,3678.74 v1(3545,3695) ; pad.2@3528.74,3753.74 v1(3545,3770) ; pad.2@3528.74,3828.74 v1(3545,3845) ; pad.2@3528.74,3903.74 v1(3545,3920) ; pad.2@3528.74,3978.74 v1(3545,3995) ; pad.2@3528.74,4053.74 v1(3545,4070) ; pad.2@3528.74,4128.74 v1(3545,4145) ; pad.2@3528.74,4203.74 v1(3545,4220)
  Bottom Layer w10: v1(3545,3095) v1(3545,3170) v1(3545,3245) v1(3545,3320) v1(3545,3395) v1(3545,3470) v1(3545,3545) v1(3545,3620) v1(3545,3695) v1(3545,3770) v1(3545,3845) v1(3545,3920) v1(3545,3995) v1(3545,4070) v1(3545,4145) v1(3545,4220)
  Bottom Layer w20: pad.8@3478,3385 3540,3385
COL_8: pad.2@3603.74,3078.74 pad.2@3603.74,3153.74 pad.2@3603.74,3228.74 pad.2@3603.74,3303.74 pad.2@3603.74,3378.74 pad.2@3603.74,3453.74 pad.2@3603.74,3528.74 pad.2@3603.74,3603.74 pad.2@3603.74,3678.74 pad.2@3603.74,3753.74 pad.2@3603.74,3828.74 pad.2@3603.74,3903.74 pad.2@3603.74,3978.74 pad.2@3603.74,4053.74 pad.2@3603.74,4128.74 pad.2@3603.74,4203.74 pad.9 | length 1644.6
  Top Layer w17: v1(3588,3095) 3588,3094.48 pad.2@3603.74,3078.74 ; v1(3588,3170) 3588,3169.48 pad.2@3603.74,3153.74 ; v1(3588,3245) 3588,3244.48 pad.2@3603.74,3228.74 ; v1(3588,3320) 3588,3319.48 pad.2@3603.74,3303.74 ; v1(3588,3395) 3588,3394.48 pad.2@3603.74,3378.74 ; v1(3588,3470) 3588,3469.48 pad.2@3603.74,3453.74 ; v1(3588,3545) 3588,3544.48 pad.2@3603.74,3528.74 ; v1(3588,3620) 3588,3619.48 pad.2@3603.74,3603.74 ; v1(3588,3695) 3588,3694.48 pad.2@3603.74,3678.74 ; v1(3588,3770) 3588,3769.48 pad.2@3603.74,3753.74 ; v1(3588,3845) 3588,3844.48 pad.2@3603.74,3828.74 ; v1(3588,3920) 3588,3919.48 pad.2@3603.74,3903.74 ; v1(3588,3995) 3588,3994.48 pad.2@3603.74,3978.74 ; v1(3588,4070) 3588,4069.48 pad.2@3603.74,4053.74 ; v1(3588,4145) 3588,4144.48 pad.2@3603.74,4128.74 ; v1(3588,4220) 3588,4219.48 pad.2@3603.74,4203.74
  Mid-Layer 1 w10: v1(3480,3314) 3516,3314 3535,3295 3575,3295 3588,3308 v1(3588,3320)
  Bottom Layer w10: v1(3588,3095) v1(3588,3170) v1(3588,3245) v1(3588,3320) v1(3588,3395) v1(3588,3470) v1(3588,3545) v1(3588,3620) v1(3588,3695) v1(3588,3770) v1(3588,3845) v1(3588,3920) v1(3588,3995) v1(3588,4070) v1(3588,4145) v1(3588,4220)
  Bottom Layer w15: pad.9 3480,3333 v1(3480,3314)
GND: pad.1@3135,4180 pad.1@3478,3735 pad.4@3408.34,3851 | length 936.6
  Mid-Layer 2 w15: 3117,3902 3139,3880 3275,3880 3335,3940 3417,3940 v1(3417,3828)
  Mid-Layer 2 w25: v1(3116,4054) 3074,4012 3074,3945 3117,3902 ; v1(3417,3828) v1(3491,3758)
  Bottom Layer w20: v1(3116,4054) 3135,4073 pad.1@3135,4180 ; pad.4@3408.3,3851 3417,3851 v1(3417,3828) ; pad.1@3478,3735 3491,3735 v1(3491,3758)
LED2_1: 
LED3_1: 
LED4_2: 
LED5_1: 
LED6_1: 
LED7_2: 
LED8_2: 
LED9_1: 
LED10_1: 
LED11_2: 
LED12_1: 
PB0_1: 
PB1_1: 
PB2_1: 
PB3_2: 
PB4_1: 
R1_2: 
R13_1: 
R_PIN: pad.1@3505,4175 pad.2@3408.34,3951 | length 439.9
  Bottom Layer w20: pad.2@3408.3,3951 3389,3951 3370,3970 3370,4030 3380,4040 3380,4185 3408,4213 3505,4213 pad.1@3505,4175
RESET: 
ROW_1: pad.1@3041.26,3041.26 pad.1@3116.26,3041.26 pad.1@3191.26,3041.26 pad.1@3266.26,3041.26 pad.1@3341.26,3041.26 pad.1@3416.26,3041.26 pad.1@3491.26,3041.26 pad.1@3566.26,3041.26 pad.25 | length 1309.8
  Top Layer w15: pad.1@3041.26,3041.26 pad.1@3566.26,3041.26
  Mid-Layer 1 w10: v1(3116,3605) 3080,3605 3046,3571 3046,3099 3104,3041 v1(3229,3041)
  Bottom Layer w10: pad.25 3112,3601 v1(3116,3605)
ROW_2: pad.1@3041.26,3116.26 pad.1@3116.26,3116.26 pad.1@3191.26,3116.26 pad.1@3266.26,3116.26 pad.1@3341.26,3116.26 pad.1@3416.26,3116.26 pad.1@3491.26,3116.26 pad.1@3566.26,3116.26 pad.24 | length 1184.6
  Top Layer w15: pad.1@3041.3,3116.3 3227.7,3116.3 v1(3228,3116) ; pad.1@3191.26,3116.26 3227.74,3116.26 v1(3228,3116) ; pad.1@3566,3116 pad.1@3570,3115 ; pad.1@3566.26,3116.26 3228.26,3116.26 v1(3228,3116)
  Mid-Layer 1 w10: v1(3116,3528) 3073,3528 3062,3517 3062,3143 3089,3116 v1(3228,3116)
  Bottom Layer w15: pad.24 3112,3532 v1(3116,3528)
ROW_3: pad.1@3041.26,3191.26 pad.1@3116.26,3191.26 pad.1@3191.26,3191.26 pad.1@3266.26,3191.26 pad.1@3341.26,3191.26 pad.1@3416.26,3191.26 pad.1@3491.26,3191.26 pad.1@3566.26,3191.26 pad.23 | length 1053.2
  Top Layer w10: pad.1@3191.26,3191.26 3229.26,3191.26 v1(3230,3192)
  Top Layer w15: pad.1@3041.3,3191.3 3229.3,3191.3 v1(3230,3192) 3230.74,3191.26 pad.1@3566.26,3191.26
  Mid-Layer 1 w10: v1@3124,3462 3124,3475 3090,3475 3078,3463 3078,3237 3110,3205 3217,3205 v1(3230,3192)
  Bottom Layer w15: pad.23 3112,3474 v1@3124,3462
  other v1: 3124,3461.5
ROW_4: pad.1@3041.26,3266.26 pad.1@3116.26,3266.26 pad.1@3191.26,3266.26 pad.1@3266.26,3266.26 pad.1@3341.26,3266.26 pad.1@3416.26,3266.26 pad.1@3491.26,3266.26 pad.1@3566.26,3266.26 pad.22 | length 868.9
  Top Layer w10: pad.1@3191.26,3266.26 3228.74,3266.26 v1(3229,3266)
  Top Layer w15: pad.1@3041.26,3266.26 pad.1@3566.26,3266.26
  Mid-Layer 1 w10: v1@3107,3445 3107,3434.7 3096,3423.7 3096,3284 3114,3266 v1(3229,3266)
  other v1: 3107.5,3445
ROW_5: pad.1@3041.26,3341.26 pad.1@3116.26,3341.26 pad.1@3191.26,3341.26 pad.1@3266.26,3341.26 pad.1@3341.26,3341.26 pad.1@3416.26,3341.26 pad.1@3491.26,3341.26 pad.1@3566.26,3341.26 pad.21 | length 780.2
  Top Layer w10: pad.1@3191.26,3341.26 3222.26,3341.26 v1(3225,3344)
  Top Layer w15: pad.1@3041.3,3341.3 3222.3,3341.3 v1(3225,3344) 3222.26,3341.26 3191.26,3341.26 pad.1@3566,3341
  Mid-Layer 1 w10: v1(3111,3384) 3111,3355 3126,3340 3221,3340 v1(3225,3344)
ROW_6: pad.1@3041.26,3416.26 pad.1@3116.26,3416.26 pad.1@3191.26,3416.26 pad.1@3266.26,3416.26 pad.1@3341.26,3416.26 pad.1@3416.26,3416.26 pad.1@3491.26,3416.26 pad.1@3566.26,3416.26 pad.20 | length 738.6
  Top Layer w15: pad.1@3041.3,3416.3 pad.1@3566.3,3416.3
  Mid-Layer 1 w10: v1(3136,3360) 3205,3360 3245,3400 3245,3419 v1(3225,3419)
  Bottom Layer w15: pad.20 3136,3335 v1(3136,3360)
ROW_7: pad.1@3041.26,3491.26 pad.1@3116.26,3491.26 pad.1@3191.26,3491.26 pad.1@3266.26,3491.26 pad.1@3341.26,3491.26 pad.1@3416.26,3491.26 pad.1@3491.26,3491.26 pad.1@3566.26,3491.26 pad.19 | length 1002.1
  Top Layer w10: pad.1@3191.26,3491.26 3222.26,3491.26 v1(3225,3494)
  Top Layer w15: pad.1@3041.3,3491.3 3222.3,3491.3 3191.26,3491.26 3227.74,3491.26 pad.1@3566,3491
  Mid-Layer 2 w10: v1(3116,3303) 3078,3303 3078,3468 3104,3494 v1(3225,3494)
  Bottom Layer w15: pad.19 3112,3299 v1(3116,3303)
ROW_8: pad.1@3041.26,3566.26 pad.1@3116.26,3566.26 pad.1@3191.26,3566.26 pad.1@3266.26,3566.26 pad.1@3341.26,3566.26 pad.1@3416.26,3566.26 pad.1@3491.26,3566.26 pad.1@3566.26,3566.26 pad.18 | length 978.8
  Top Layer w10: pad.1@3191.26,3566.26 3228.74,3566.26 v1(3229,3566)
  Top Layer w15: pad.1@3041.3,3566.3 3228.7,3566.3 v1(3229,3566) 3229.26,3566.26 pad.1@3566.26,3566.26
  Mid-Layer 2 w10: v1(3117,3228) 3184,3295 3215,3295 3245,3325 3245,3550 v1(3229,3566)
ROW_9: pad.1@3041.26,3641.26 pad.1@3116.26,3641.26 pad.1@3191.26,3641.26 pad.1@3266.26,3641.26 pad.1@3341.26,3641.26 pad.1@3416.26,3641.26 pad.1@3491.26,3641.26 pad.1@3566.26,3641.26 pad.17 | length 1216.5
  Top Layer w10: pad.1@3191.26,3641.26 3227.74,3641.26 v1(3229,3640)
  Top Layer w15: pad.1@3041.3,3641.3 3227.7,3641.3 v1(3229,3640) 3230.26,3641.26 pad.1@3566.26,3641.26
  Mid-Layer 2 w10: v1(3106,3164) 3135.5,3191.3 3190,3195 3287.8,3292.8 3287.8,3622.2 3270,3640 v1(3229,3640)
  Bottom Layer w15: v1(3106,3164) 3106,3179 pad.17
ROW_10: pad.1@3041.26,3716.26 pad.1@3116.26,3716.26 pad.1@3191.26,3716.26 pad.1@3266.26,3716.26 pad.1@3341.26,3716.26 pad.1@3416.26,3716.26 pad.1@3491.26,3716.26 pad.1@3566.26,3716.26 pad.16 | length 1343.4
  Top Layer w10: pad.1@3191.26,3716.26 3228.26,3716.26 v1(3229,3717)
  Top Layer w15: pad.1@3041.3,3716.3 3228.3,3716.3 v1(3229,3717) 3229.74,3716.26 pad.1@3566.26,3716.26
  Mid-Layer 2 w10: v1(3127,3143) 3218,3143 3260,3185 3303.9,3225.2 3303.9,3691.1 3278,3717 v1(3229,3717)
  Bottom Layer w15: pad.16 3120,3143 v1(3127,3143)
ROW_11: pad.1@3041.26,3791.26 pad.1@3116.26,3791.26 pad.1@3191.26,3791.26 pad.1@3266.26,3791.26 pad.1@3341.26,3791.26 pad.1@3416.26,3791.26 pad.1@3491.26,3791.26 pad.1@3566.26,3791.26 pad.15 | length 1564.6
  Top Layer w10: pad.1@3191.26,3791.26 3229.26,3791.26 v1(3230,3792)
  Top Layer w15: pad.1@3041.3,3791.3 3229.3,3791.3 v1(3230,3792) 3230.74,3791.26 pad.1@3566.26,3791.26
  Mid-Layer 2 w10: v1(3116,3079) 3127,3068 3237,3068 3255,3050 3290,3050 3320,3080 3320,3740 3268,3792 v1(3230,3792)
ROW_12: pad.1@3041.26,3866.26 pad.1@3116.26,3866.26 pad.1@3191.26,3866.26 pad.1@3266.26,3866.26 pad.1@3341.26,3866.26 pad.1@3416.26,3866.26 pad.1@3491.26,3866.26 pad.1@3566.26,3866.26 pad.14 | length 1415.2
  Top Layer w15: pad.1@3041.26,3866.26 pad.1@3566.26,3866.26
  Mid-Layer 1 w10: v1(3295,3866) 3295,3460 3365,3390 3365,3165 3450,3080 v1(3490,3080)
ROW_13: pad.1@3041.26,3941.26 pad.1@3116.26,3941.26 pad.1@3191.26,3941.26 pad.1@3266.26,3941.26 pad.1@3341.26,3941.26 pad.1@3416.26,3941.26 pad.1@3491.26,3941.26 pad.1@3566.26,3941.26 pad.13 | length 1442.3
  Top Layer w15: pad.1@3041.26,3940.26 pad.1@3566.26,3940.26
  Mid-Layer 1 w10: v1(3295,3940) 3320,3915 3320,3510 3390,3440 3390,3210 3447,3153 v1(3491,3153)
  Bottom Layer w15: pad.13 3491,3148 v1(3491,3153)
ROW_14: pad.1@3041.26,4016.26 pad.1@3116.26,4016.26 pad.1@3191.26,4016.26 pad.1@3266.26,4016.26 pad.1@3341.26,4016.26 pad.1@3416.26,4016.26 pad.1@3491.26,4016.26 pad.1@3566.26,4016.26 pad.12 | length 1433.2
  Top Layer w15: pad.1@3041.26,4016.26 pad.1@3566.26,4016.26
  Mid-Layer 2 w10: v1(3461,4017) 3503,4017 3526.11,3993.89 3526.11,3225.11 v1(3511,3210)
  Bottom Layer w15: pad.12 3486,3185 v1(3511,3210)
ROW_15: pad.1@3041.26,4091.26 pad.1@3116.26,4091.26 pad.1@3191.26,4091.26 pad.1@3266.26,4091.26 pad.1@3341.26,4091.26 pad.1@3416.26,4091.26 pad.1@3491.26,4091.26 pad.1@3566.26,4091.26 pad.11 | length 1738.9
  Top Layer w15: pad.1@3041.26,4091.26 pad.1@3566.26,4091.26
  Mid-Layer 2 w10: v1(3462,4092) 3553,4092 3566,4079 3566,3145 3535,3145 3500,3180 3475,3180 3475,3237 v1(3483,3237)
ROW_16: pad.1@3041.26,4166.26 pad.1@3116.26,4166.26 pad.1@3191.26,4166.26 pad.1@3266.26,4166.26 pad.1@3341.26,4166.26 pad.1@3416.26,4166.26 pad.1@3491.26,4166.26 pad.1@3566.26,4166.26 pad.10 | length 2227.8
  Top Layer w10: v1(3462,4167) 3565.52,4167 pad.1@3566.26,4166.26
  Top Layer w15: pad.1@3041.26,4166.26 3042,4167 v1(3462,4167)
  Mid-Layer 2 w10: v1(3462,4167) 3610,4167 3610,3075 3585,3050 3475,3050 3450,3075 3450,3270 3475,3295 v1(3500,3295)
  Bottom Layer w15: pad.10 3490,3285 v1(3500,3295)
RST: pad.1@3416,4001
RX: pad.3@3408.34,3901
SCL: pad.7@3117,3951 pad.26 R_SCL.2 | length 422.2
  Mid-Layer 1 w17: v1(3058,3662) v1@3058,3845
  Bottom Layer w15: v1(3058,3662) 3085,3635 pad.26 ; v1@3058,3845 3058,3920 3050,3920 3062,3932 3117,3932 pad.7@3117,3951
  other v1: 3058,3845.5
SDA: pad.5@3117,3851 pad.27 | length 255
  Bottom Layer w15: 3090,3800 3054,3800 3054,3712.4 3081.4,3685 pad.27 ; 3090.32,3800 3090.32,3824.32 pad.5@3117,3851
TX: pad.6@3117,3901
VCC: C_IN.1 NONE.1 pad.1@3065,4180 pad.8@3117,4001 pad.28 | length 664.4
  Mid-Layer 1 w25: v1(3116,3756) 3116,3849 3075,3890 3075,3937 v1(3117,3979)
  Bottom Layer w20: 3056.2,3962 3065,3962 3065,4001 ; pad.1@3065,4180 3065,4001 ; pad.28 3116,3735 v1(3116,3756) 3130,3740 NONE.1 ; v1(3117,3979) 3117,4001 3065,4001
pads on no net: C_IN.2 NONE.2 R_SCL.1

## Polygon pours and split planes (outlines as drawn)
GND on Mid-Layer 2 "Mid-Layer 2-GND" (solid, remove dead copper, pour order 0): 3005,4240 3640,4240 3640,3005 3005,3005 3005,3010

## Silkscreen, mask and mechanical layers (free items; w line width, h text height)
Bottom Overlay:
  text "simplemods.ru" at 3581.15,4082.43 h43.06
  text "U1" at 3297.08,3877.24 h57.42
  text "JLCJLCJLCJLC" at 3613.65,3845.08 h37.68 r90
  text "U2" at 3336.08,3358.24 h57.42
Mechanical 1:
  the board outline again, w10